# Altium PCB EE52_Digital_Oscilloscope.PcbDoc (part 3 of 5)
Units mil, origin at the board's own origin, x right, y up, seen from the top; angles counter-clockwise.
Board outline 7431 x 5662 mil, 2 copper layers (Top Layer, Bottom Layer); 305 components, 396 nets, 1532 pads, 389 vias.
Unrouted connection lines stored in the file: 2.
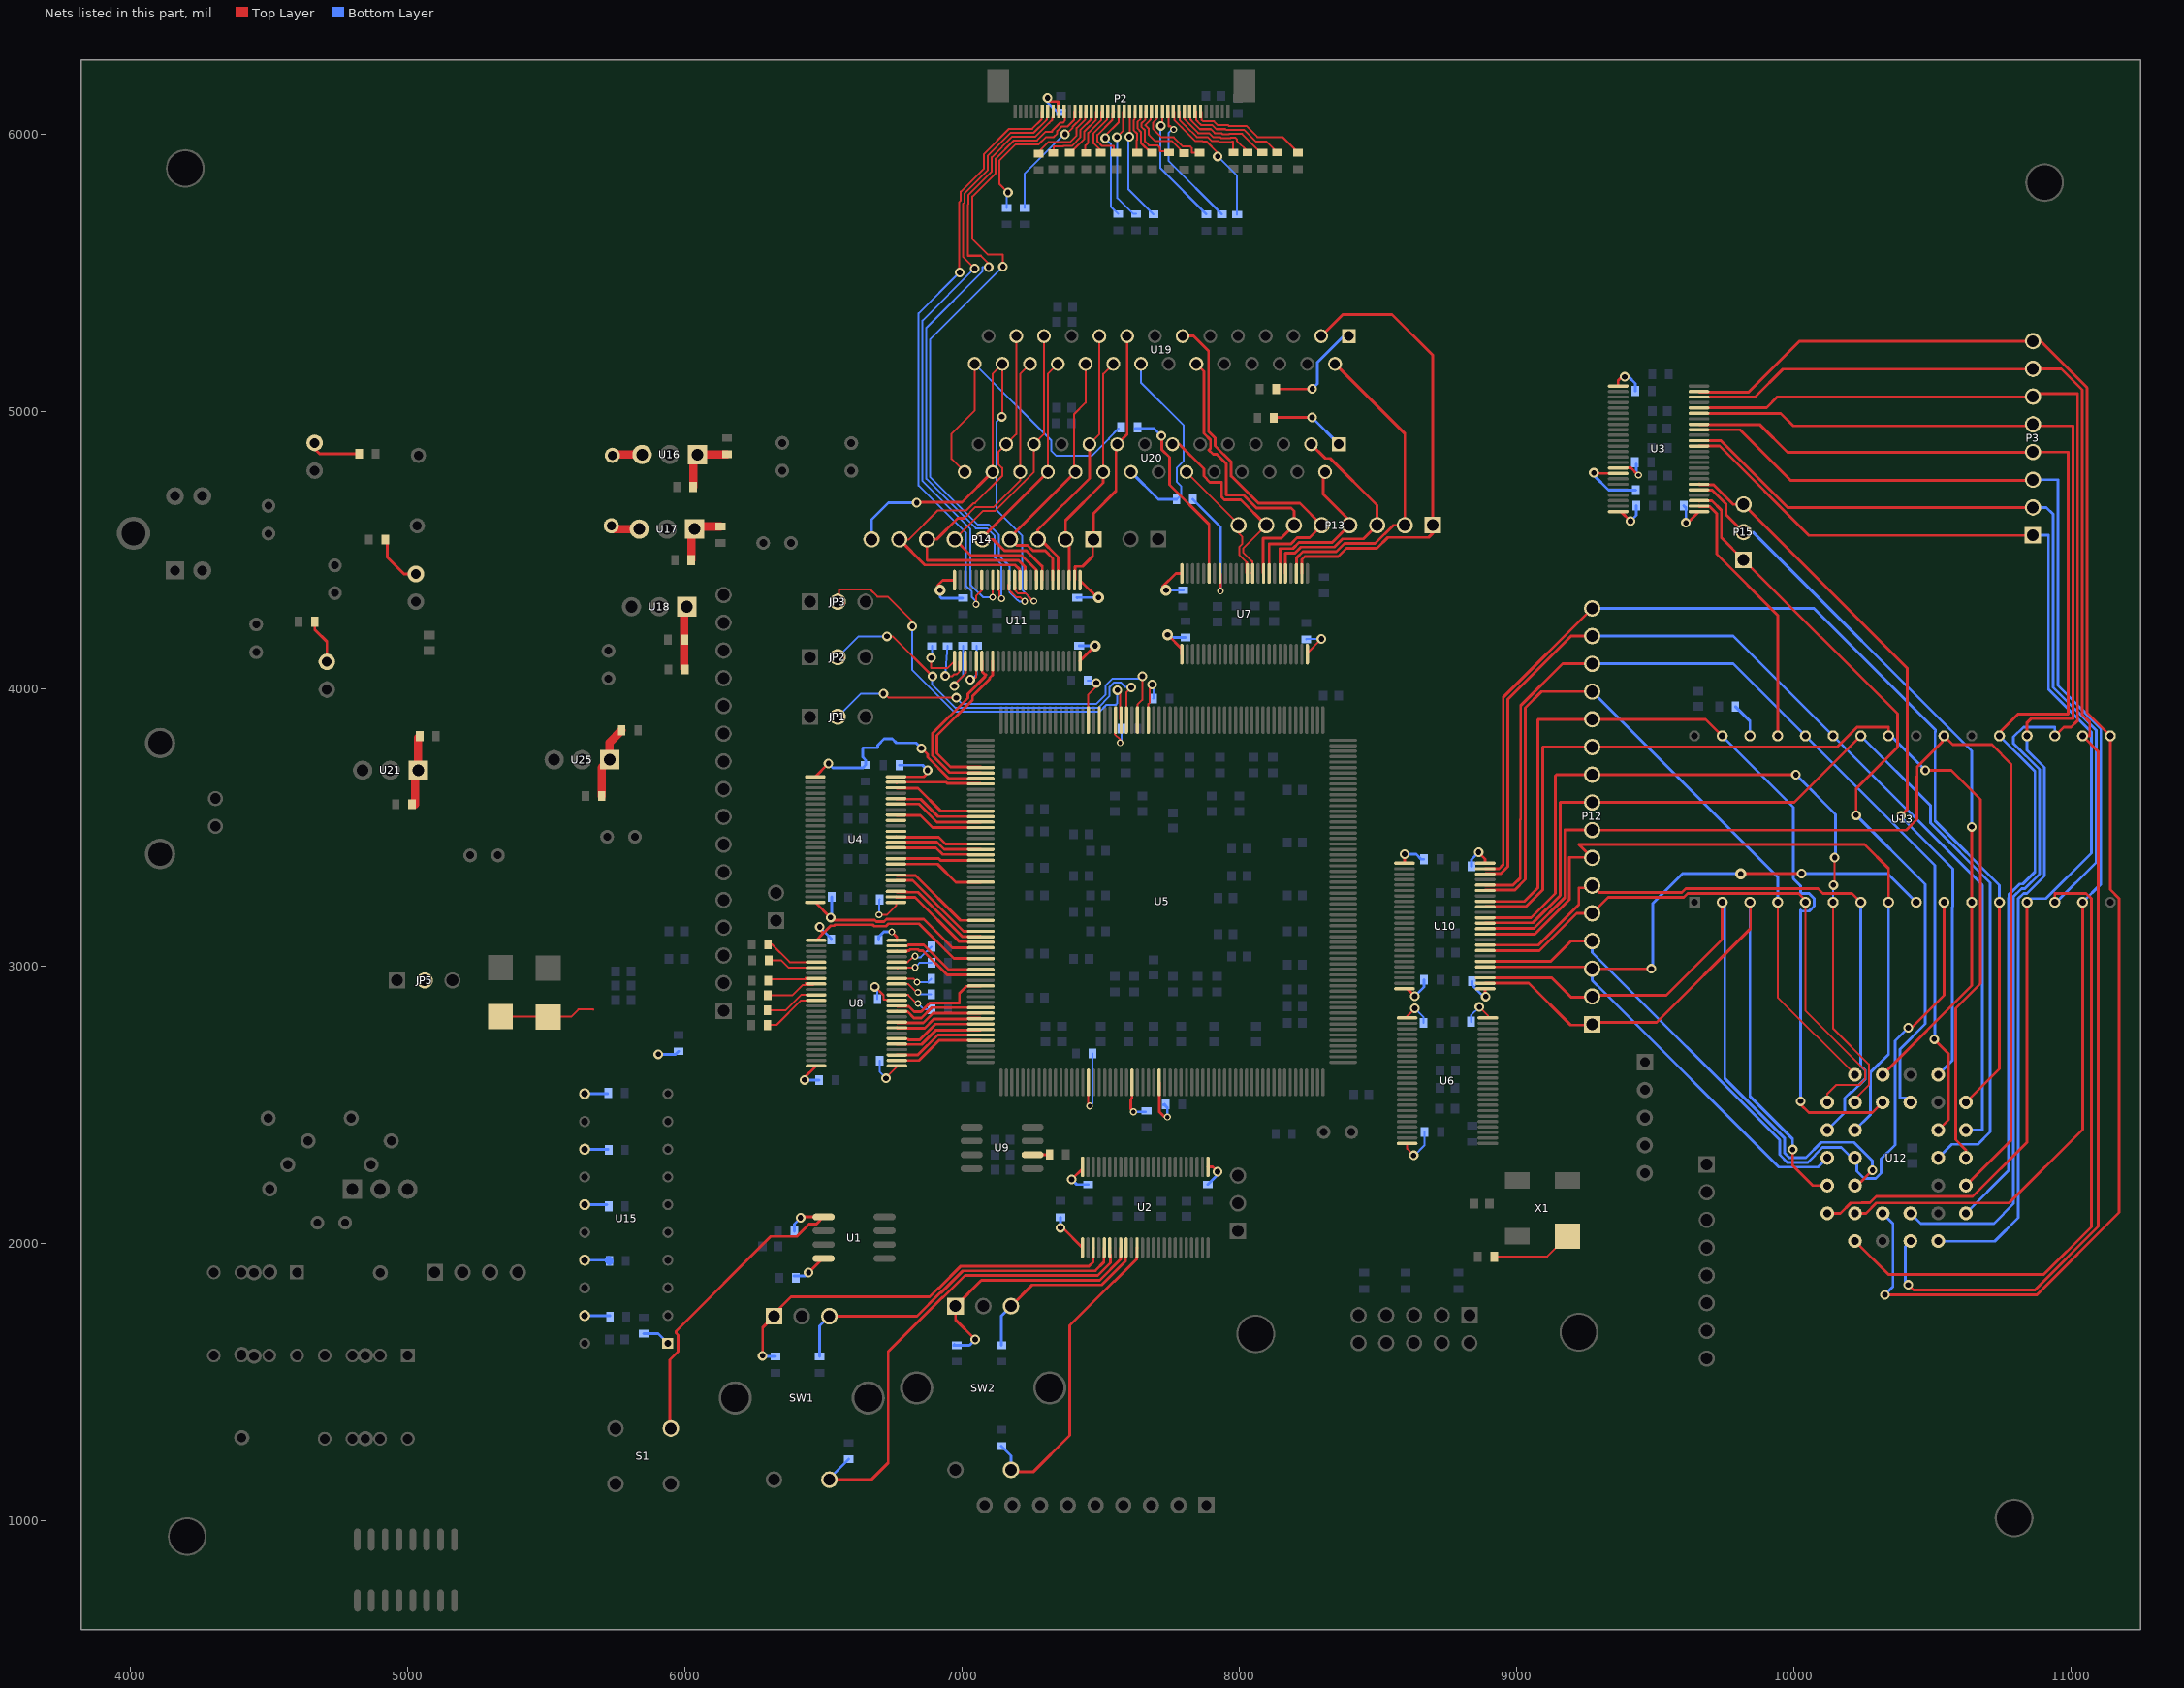
[diagram p3: the nets of this part, all layers, seen from the top]

## Via types
v1: diameter 35, hole 20, Top Layer to Bottom Layer, 188 vias
v2: diameter 25, hole 15, Top Layer to Bottom Layer, 82 vias
v3: diameter 60, hole 42, Top Layer to Bottom Layer, 48 vias
v4: diameter 50, hole 35, Top Layer to Bottom Layer, 46 vias
v5: diameter 80, hole 62, Top Layer to Bottom Layer, 14 vias
v6: diameter 40, hole 20, Top Layer to Bottom Layer, 10 vias
v7: diameter 45, hole 30, Top Layer to Bottom Layer, 1 vias

## Nets (pads, with @x,y where several pads share a name; then routed paths per layer and width w, separated by ;. In a path a pad name is that pad's centre, name@x,y a point inside that pad or via, vN(x,y) a via of type N, cw(c..) or ccw(c..) an arc to the next point about the centre after c; other vN are vias at no path point) (continued)
IO186: U5.186 U11.32 | length 597.4
  Top Layer w10: U5.186@7067.17,3715.83 7067.17,3717.61 6958.23,3717.61 6909,3766.83 6909,3831.74 7037.09,3959.83 7037.09,3973.81 7097.06,4033.77 7097.06,4034.39 7099.74,4037.07 7099.74,4039.56 7110.49,4050.31 7110.04,4050.75 U11.32@7110.04,4100.22
IO187: U5.187 U11.30 | length 632.6
  Top Layer w10: U5.187@7067.17,3694.36 U5.187@7067.17,3696.14 7065.39,3697.92 6953.87,3697.92 6892,3759.79 6892,3838.78 7020.09,3966.88 7020.09,3981.47 7082.74,4044.12 7082.74,4046.6 7086.45,4050.31 7085.93,4050.82 7082.94,4050.82 7072.45,4061.31 7072.45,4098.44 U11.30@7070.67,4100.22
IO188: R3.1 U4.1 U5.188 | length 787.1
  Top Layer w10: U4.1@6470,3682.44 v1(6517.56,3730) ; v1(6853,3785) 6875,3763 6875,3752.75 6951.29,3676.46 U5.188@7067.17,3676.46
  Bottom Layer w10: v1(6517.56,3730) 6533.06,3714.5 6641.97,3714.5 R3.1@6652,3724.53 6652,3743 6641,3754 6641,3785 6643.22,3787.22 6693.5,3787.22 6696,3789.72 6696,3797.33 6717.67,3819 6748.33,3819 6762.83,3804.5 6833.5,3804.5 v1(6853,3785)
IO189: U4.47 U5.189 | length 310.8
  Top Layer w10: U4.47@6763.12,3660.98 U4.47@6761.34,3662.76 6940.95,3662.76 6945.16,3658.55 7065.39,3658.55 U5.189@7067.17,3656.77
IO194: U4.46 U5.194 | length 340.9
  Top Layer w10: U4.46@6761.34,3643.07 6763.12,3641.29 6840.71,3641.29 6923.65,3558.35 U5.194@7067.17,3558.35
IO195: U4.44 U5.195 | length 332.8
  Top Layer w10: U4.44@6761.34,3603.7 6763.04,3602 6850,3602 6913.34,3538.66 U5.195@7067.17,3538.66
IO196: U4.43 U5.196 | length 333.2
  Top Layer w10: U4.43@6761.34,3584.02 6761.8,3584.48 6843.48,3584.48 6908.98,3518.98 U5.196@7067.17,3518.98
IO197: U4.41 U5.197 | length 324.6
  Top Layer w10: U4.41@6761.34,3544.65 6762.98,3543 6849,3543 6892.71,3499.29 U5.197@7067.17,3499.29
IO198: U4.40
IO199: U4.38
IO200: U4.37 U5.200 | length 316.5
  Top Layer w10: U4.37@6761.34,3465.91 6763.12,3464.13 6800.38,3464.13 6800.38,3464 6916,3464 6939.76,3440.24 U5.200@7067.17,3440.24
IO201: U4.36 U5.201 | length 318.9
  Top Layer w10: U4.36@6761.34,3444.44 U4.36@6761.34,3446.22 6762.12,3447 6908.96,3447 6935.41,3420.55 U5.201@7067.17,3420.55
IO202: U4.35 U5.202 | length 316.5
  Top Layer w10: U4.35@6761.34,3426.54 6905.38,3426.54 6929.27,3402.65 7065.39,3402.65 U5.202@7067.17,3400.87
IO203: U4.33 U5.203 | length 308.3
  Top Layer w10: U4.33@6761.34,3387.17 6761.5,3387 6916.04,3387 6921.86,3381.18 U5.203@7067.17,3381.18
IO207: U4.32 U5.207 | length 332.8
  Top Layer w10: U4.32@6761.34,3367.48 6911.52,3367.48 6976.56,3302.44 U5.207@7067.17,3302.44
IO214: U4.30 U5.214 | length 373.5
  Top Layer w10: U4.30@6761.34,3328.11 6763.12,3326.33 6831.67,3326.33 6993.35,3164.65 U5.214@7067.17,3164.65
IO216: U4.29 U5.216 | length 381.7
  Top Layer w10: U4.29@6761.34,3308.43 6821.57,3308.43 7004.72,3125.28 U5.216@7067.17,3125.28
IO217: U4.27 U5.217 | length 376.8
  Top Layer w10: U4.27@6761.34,3269.06 6763.12,3267.28 6801.55,3267.28 6801.55,3265.98 6839.98,3265.98 7000.37,3105.59 U5.217@7067.17,3105.59 U5.217@7065.39,3107.37
IO218: U4.26 U5.218 | length 374.6
  Top Layer w10: U4.26@6761.34,3249.37 6761.34,3247.59 6830.41,3247.59 6990.32,3087.68 7065.39,3087.68 U5.218@7067.17,3085.91
IO219: R6.1 U4.24 U5.219 | length 763.8
  Top Layer w10: U4.24@6470,3229.69 v1(6525,3174.69) ; v1@6525,3180 v1(6525,3174.69) ; U5.219@7067.17,3066.22 6964.82,3066.22 6861.54,3169.5 6726.74,3169.5 6717.74,3160.5 6689.85,3160.5 6684.35,3166 6533.69,3166 v1(6525,3174.69)
  Bottom Layer w10: v1(6525,3174.69) 6525,3184 6529.47,3179.53 R6.1@6529.47,3250
IO221: R12.1 U5.221 U8.1 | length 767
  Top Layer w10: U8.1@6473,3092.44 6498.56,3118 ; v1(6486,3141) 6486,3130.56 6498.56,3118 ; U5.221@7067.17,3026.85 6970.15,3026.85 6844.5,3152.5 6733.78,3152.5 6724.78,3143.5 6682.81,3143.5 6677.31,3149 6541.03,3149 6537.22,3145.19 6525.75,3145.19 6498.56,3118
  Bottom Layer w10: v1(6486,3141) 6527.47,3099.53 R12.1@6527.47,3095
IO223: U5.223 U8.47 | length 341.1
  Top Layer w10: U8.47@6764.34,3072.76 6801.47,3072.76 6805.22,3076.5 6861.01,3076.5 6864.76,3072.76 ; 6865,3073 6950.52,2987.48 U5.223@7067.17,2987.48
IO224: U5.224 U8.46 | length 345.4
  Top Layer w10: U8.46@6764.34,3053.07 6764.93,3052.48 6800.5,3052.48 6800.5,3054.85 6803.25,3054.85 6804.16,3055.76 6808.51,3055.76 6812.26,3059.5 6840.15,3059.5 6843.89,3055.76 6858.2,3055.76 6946.16,2967.8 U5.224@7067.17,2967.8
IO226: U5.226 U8.36 | length 370.4
  Top Layer w10: U8.36@6764.34,2856.22 6766.12,2854.44 6807.61,2854.44 6827.05,2835 6851.67,2835 6883.35,2866.69 6990,2866.69 6990,2900.99 7015.65,2926.65 7065.39,2926.65 U5.226@7067.17,2928.43
IO230: U5.230 U8.35 | length 328.3
  Top Layer w10: U8.35@6764.34,2836.54 6766.12,2834.76 6803.25,2834.76 6824.78,2813.22 6825.62,2812.39 6853.09,2812.39 6890.39,2849.69 U5.230@7067.17,2849.69
IO231: U5.231 U8.33 | length 318.1
  Top Layer w10: U8.33@6764.34,2797.17 6766.12,2795.39 6859.61,2795.39 6859.88,2795.12 6894.75,2830 U5.231@7067.17,2830
IO232: U5.232 U8.32 | length 319.4
  Top Layer w10: U8.32@6764.34,2777.48 6766.12,2775.7 6864.49,2775.7 6897.33,2808.54 7019.4,2808.54 7022.96,2812.09 7065.39,2812.09 U5.232@7067.17,2810.32
IO233: U5.233 U8.30 | length 328
  Top Layer w10: U8.30@6764.34,2738.11 6764.45,2738 6779.78,2738 6781.44,2736.33 6803.25,2736.33 6805.58,2734 6846.83,2734 6903.46,2790.63 U5.233@7067.17,2790.63
IO234: U5.234 U8.29 | length 325.8
  Top Layer w10: U8.29@6764.34,2718.43 6775.31,2718.43 6776.73,2717 6853.88,2717 6906.04,2769.17 7065.39,2769.17 U5.234@7067.17,2770.94
IO235: U5.235 U8.27 | length 332.8
  Top Layer w10: U8.27@6764.34,2679.06 6764.39,2679 6839.92,2679 6912.18,2751.26 U5.235@7067.17,2751.26
IO236: U5.236 U8.26 | length 332.7
  Top Layer w10: U8.26@6764.34,2659.37 6844.33,2659.37 6916.53,2731.57 U5.236@7067.17,2731.57
MSEL0: JP1.2 U5.155 | length 1388.8
  Top Layer w7: v1(6716,3982) 6716,3986 6734,3968 6979,3968 v1(6979,3967.5) ; U5.155@7632.13,3887.09 7632.13,3942.13 7650,3960 v1(7650,4045)
  Bottom Layer w7: JP1.2@6551,3899 6634,3982 v1(6716,3982) ; v1@6977,3965 v1@6979,3967 ; v1(6979,3967.5) v1@6979,3967 ; v1@7658.2,4036.8 7658,4037 7542.6,4037 7518,4012.4 7518,3979.4 7483.6,3945 7001,3945 v1@6979,3967
MSEL1: JP2.2 U5.157 | length 1401.7
  Top Layer w7: v1(6729,4189) 6749,4189 6893,4045 v1(6892.5,4044.5) ; U5.157@7592.76,3887.09 7592.76,3987.76 v1(7610,4005)
  Bottom Layer w7: JP2.2@6551,4114 6626,4189 v1(6729,4189) ; v1(6892.5,4044.5) 6890.5,4044.5 6890.5,4016.4 6975.9,3931 7489.4,3931 7532,3973.6 7532,4006.6 7548.4,4023 7571.6,4023 7588,4006.6 v1@7604,4006.6
MSEL2: JP3.2 U5.158 | length 1527.8
  Top Layer w7: JP3.2@6551,4314 6555,4318 6555,4357.5 6669.11,4357.5 6694.11,4332.5 6731.5,4332.5 6820,4244 v1(6820,4225) ; v1(7560,3995) 7569.79,3985.21 7569.79,3890.37 U5.158@7573.07,3887.09
  Bottom Layer w7: v1(6820,4225) 6833,4225 6820,4212 6820,4067.1 6970.1,3917 7495.2,3917 7520.2,3942 7554,3942 7560,3948 v1(7560,3995)
NCEO: U5.162
NetC116_1: 
NetC117_1: 
NetC120_1: 
NetD1_1: D1.1 R106.2 | length 192
  Top Layer w10: R106.2@4925.53,4538 4925.53,4474.47 4986,4414 D1.1@5029,4414
NetD2_1: 
NetD3_1: D3.1 R105.2 | length 187.7
  Top Layer w10: D3.1@4650,4880 4682,4848 R105.2@4824.47,4848
NetD5_1: D5.1 D7.2 | length 346.8
  Top Layer w7: D7.2@5334,2817.42 5589.42,2817.42 5615,2843 5668.7,2843 5669.75,2841.95
NetD6_1: D6.1 R113.1 | length 163
  Top Layer w10: R113.1@4664.53,4242 4664.53,4213.47 4708,4170 D6.1@4708,4097
NetD8_1: 
NetJP5_2: JP5.2
NetP2_5: P2.5 R89.2 | length 428.4
  Top Layer w7: P2.5@7859.94,6081.5 7863.22,6078.22 7863.22,6052.54 7869.38,6046.39 7908.63,6046.39 7922.63,6032.39 7959.01,6032.39 7961.4,6030 8025.02,6030 8065.02,5990 8155.53,5990 R89.2@8212,5933.53
NetP2_6: P2.6 R70.1 | length 374.6
  Top Layer w7: P2.6@7840.26,6081.5 7843.54,6081.5 7843.54,6052.54 7849.22,6046.85 7849.22,6046.74 7863.58,6032.39 7902.83,6032.39 7916.83,6018.39 7949.78,6018.39 7952.17,6016 8017.1,6016 8058.6,5974.5 8097.03,5974.5 R70.1@8137,5934.53
NetP2_7: P2.7 R69.2 | length 338.3
  Top Layer w7: P2.7@7820.57,6081.5 7823.85,6078.22 7823.85,6052.43 7835.22,6041.06 7835.22,6040.94 7857.78,6018.39 7897.03,6018.39 7911.03,6004.39 7935.78,6004.39 7939.39,6000.78 7962.7,6000.78 ; 7962.92,6001 8010.18,6001 8076.65,5934.53 R69.2@8083,5934.53
NetP2_8: P2.8 R72.1 | length 310.5
  Top Layer w7: P2.8@7800.89,6081.5 7800.89,6055.59 7821.22,6035.26 7821.22,6035.14 7851.98,6004.39 7891.23,6004.39 7905.23,5990.39 7929.99,5990.39 7933.59,5986.78 7968.5,5986.78 7968.72,5987 7986.19,5987 7991,5982.19 7991,5977.04 R72.1@8030,5938.04
  Top Layer w10: R72.1@8030,5934.53 R72.1@8030,5938.04
NetP2_9: P2.9 R71.2 | length 298.3
  Top Layer w7: P2.9@7781.2,6081.5 P2.9@7784,6078.7 ; P2.9@7784,6081.5 P2.9@7784,6078.7 ; R71.2@7977,5936.53 7977,5973 7974.51,5973 7974.3,5972.78 7927.79,5972.78 7924.19,5976.39 7899.43,5976.39 7885.43,5990.39 7846.18,5990.39 7807.22,6029.34 7807.22,6029.46 7784.48,6052.2 7784.48,6078.22 P2.9@7784,6078.7
  Top Layer w10: R71.2@7977,5936.53 R71.2@7979,5934.53
NetP2_10: P2.10 R74.1 | length 488.8
  Top Layer w7: P2.10@7761.52,6081.5 7764.8,6078.22 7764.8,6052.08 7793.22,6023.66 7793.22,6023.55 7840.38,5976.39 7866.63,5976.39 7869,5974.01 7880.99,5974.01 7922,5933 v1(7922,5920)
  Bottom Layer w7: v1(7922,5920) 7992,5850 R74.1@7992,5710.53
NetP2_11: P2.11 R73.2 | length 471
  Top Layer w7: P2.11@7738.56,6078.22 P2.11@7741.83,6081.5 7745.11,6078.22 7745.11,6028.89 7751.11,6028.89 v2(7763,6017)
  Bottom Layer w7: v2@7756,6017 7745,6006 7745,5903.53 R73.2@7937,5711.53
NetP2_12: P2.12 R76.1 | length 442
  Top Layer w7: v1(7717,6030.5) 7717.5,6030.5 7722.15,6035.15 P2.12@7722.15,6081.5
  Bottom Layer w7: v1(7717,6030.5) 7717,6021 7715,6019 7715,5877.53 R76.1@7881,5711.53
NetP2_13: P2.13 R75.2 | length 281.8
  Top Layer w7: P2.13@7702.46,6081.5 7702.46,6055.71 7688,6041.24 7688,6019.9 7718.9,5989 7763.33,5989 7796.52,5955.81 7823.07,5955.81 7829.22,5949.66 7829.22,5933.53 R75.2@7857,5933.53
NetP2_14: P2.14 R78.1 | length 252.6
  Top Layer w7: P2.14@7682.78,6081.5 7679.5,6078.22 7679.5,6052.54 7674,6047.04 7674,6046.58 7661,6033.58 7661,6031.99 7673,6019.99 7673,5998.67 7677.11,5994.55 7696.67,5975 7757.53,5975 R78.1@7801,5931.53
NetP2_15: P2.15 R79.2 | length 230.5
  Top Layer w7: P2.15@7663,6082.42 7659.82,6079.24 7659.82,6052.2 7646.04,6038.42 7646.04,6027.16 7659,6014.2 7659,5974.44 7673.44,5960 7704.87,5960 7713.22,5951.66 7713.22,5940.39 7714.6,5939 7741.53,5939 R79.2@7746,5934.53
NetP2_16: P2.16 R80.1 | length 191.8
  Top Layer w7: P2.16@7643.41,6081.5 7643.41,6055.59 7632.04,6044.22 7632.04,6021.36 7645,6008.4 7645,5968.64 7680.11,5933.53 R80.1@7685,5933.53 ; R80.1@7669.76,5946 R80.1@7679.9,5935.86
NetP2_17: P2.17 R81.2 | length 156.7
  Top Layer w7: P2.17@7623,6080.77 7623,6054.98 7618.04,6050.02 7618.04,6015.56 7631,6002.6 7631,5979.4 7629,5977.4 7629,5936.53 R81.2@7632,5933.53
NetP2_18: P2.18 R82.1 | length 409.7
  Top Layer w7: v1(7603,5991) 7603,6006 7604.04,6007.04 P2.18@7604.04,6081.5
  Bottom Layer w7: v1(7603,5991) 7599,5987 7599,5802.53 R82.1@7690,5711.53
NetP2_19: P2.19 R83.2 | length 415
  Top Layer w7: v1(7558,5990) 7581.08,6013.08 7581.08,6078.22 P2.19@7584.35,6081.5
  Bottom Layer w7: v1(7558,5990) 7558,5980 7560,5978 7560,5770 7617.47,5712.53 R83.2@7628,5712.53
NetP2_20: P2.20 R84.1 | length 408.6
  Top Layer w7: v1(7516,5986) 7516,5995 7564.67,6043.67 P2.20@7564.67,6081.5
  Bottom Layer w7: v1(7516,5986) 7536,5966 7536,5739.53 R84.1@7563,5712.53
NetP2_21: P2.21 R85.2 | length 229.6
  Top Layer w7: R85.2@7548.26,5930 7548.26,5941.07 7547.6,5941.74 7547.6,5958.6 7547,5958 7504.4,5958 7488,5974.4 7488,5998.04 7541.71,6051.74 7541.71,6071.66 P2.21@7548.26,6078.22 ; R85.2@7551.26,5937.26 R85.2@7555,5933.53
NetP2_22: P2.22 R86.1 | length 182.3
  Top Layer w7: R86.1@7500,5932 7500,5943 7498.6,5943 7474,5967.6 7474,6003.84 7522.02,6051.86 7522.02,6078.22 P2.22@7525.3,6081.5
NetP2_23: P2.23 R87.2 | length 175
  Top Layer w7: R87.2@7444,5932 7444,5959 7455.1,5970.1 7455.1,6004.73 7502.34,6051.97 7502.34,6078.22 P2.23@7505.61,6081.5
NetP2_24: P2.24 R88.1 | length 204.5
  Top Layer w7: R88.1@7393,5931 7385,5939 7385,5943 7400.2,5943 7441.1,5983.9 7441.1,6010.53 7482.65,6052.08 7482.65,6078.22 P2.24@7485.93,6081.5
NetP2_25: P2.25 R77.2 | length 252.1
  Top Layer w7: R77.2@7329,5932.53 R77.2@7329,5940 ; R77.2@7330,5931 7330,5957 7365.13,5957 7365.93,5957.81 7395.2,5957.81 7427.1,5989.7 7427.1,6016.33 7462.97,6052.2 7462.97,6078.22 P2.25@7466.24,6081.5
NetP2_26: P2.26 R90.1 | length 266.3
  Top Layer w7: R90.1@7271.86,5934.66 7273.47,5934.66 7310.61,5971.81 7389.41,5971.81 7413.1,5995.5 7413.1,6022.13 7443.28,6052.31 7443.28,6078.22 P2.26@7446.56,6081.5
NetP2_27: P2.27 R91.2 | length 440.7
  Top Layer w7: v1(7371,6000) 7371.17,6000 7375.17,6004 7379.7,6004 7399.1,6023.4 7399.1,6027.93 7426.87,6055.71 P2.27@7426.87,6081.5 P2.27@7423.59,6078.22
  Bottom Layer w7: R91.2@7226,5734.53 7226,5859 7368,6001 7370,6001 v1(7371,6000)
NetP2_28: P2.28 R92.1 | length 550.4
  Top Layer w7: v1(7165,5790) 7135,5820 7135,5906 7192.5,5963.5 7275.95,5963.5 7302.84,5990.39 7330.19,5990.39 7343,6003.2 7343,6011.6 7359.4,6028 7379.37,6028 7403.91,6052.54 7403.91,6078.22 P2.28@7407.19,6081.5
  Bottom Layer w7: R92.1@7161,5734.53 7161,5786 v1(7165,5790)
NetP2_30: P2.30 U11.14 | length 2451.2
  Top Layer w7: v1(7147,5523) 7147,5567 7092,5567 7036.9,5622.1 7036.9,5775.9 7121,5860 7121,5911.8 7186.7,5977.5 7270.16,5977.5 7301.66,6009 7325,6009 7325,6013.4 7353.6,6042 7363.78,6042 7371.1,6049.32 P2.30@7371.1,6078.22 ; U11.14@7171,4389.66 7171,4375 7165.82,4375 7165.82,4359.71 7174.1,4351.43 7174.21,4351.43 7178.06,4347.58 7178.06,4347.47 7195.87,4329.66 7210.34,4329.66 v2(7225,4315) ; P2.30@7364.54,6078.22 P2.30@7367.82,6081.5
  Bottom Layer w7: v1(7147,5523) 6885,5261 6885,4763 7054.97,4593.03 7095.38,4593.03 7132.97,4555.43 7132.97,4480.03 7171,4442 7171,4348 7199.52,4319.48 7200.8,4319.48 7205.64,4314.64 7206,4315 v2(7225,4315)
NetP2_31: P2.31 R93.1 | length 163.6
  Top Layer w10: v1(7308,6131) 7308,6126.1 7316,6118.1 7346.35,6118.1 7346.35,6083.28 P2.31@7348.13,6081.5
  Bottom Layer w10: v1(7308,6131) 7308,6115 7343.53,6079.47 R93.1@7357,6079.47
NetP2_32: P2.32 U11.16 | length 2309.3
  Top Layer w7: v1(7095,5521) 7095,5534 7067,5562 7021,5562 7021,5747 7022.9,5748.9 7022.9,5781.7 7107,5865.8 7107,5917.6 7180.9,5991.5 7264.36,5991.5 7313.8,6040.94 7313.8,6041.06 7325.17,6052.43 7325.17,6060.39 7328.45,6060.39 P2.32@7328.45,6081.5 ; U11.16@7129.73,4391.56 7129.73,4356.55 7133.96,4352.31 7133.96,4328.04 7137,4325 7137.36,4325.36 v2(7142,4325.36)
  Bottom Layer w7: v1(7095,5521) 7074,5521 7073,5520 7073,5504.4 6871,5302.4 6871,4757.2 7049.17,4579.03 7089.58,4579.03 7117,4551.61 7117,4474 7144,4447 7142,4445 v2(7142,4325.36)
NetP2_33: P2.33 U11.17 | length 2211.2
  Top Layer w7: v1(7045,5516) 7003,5558 7003,5749 7008.9,5754.9 7008.9,5787.5 7093,5871.6 7093,5923.4 7175.1,6005.5 7258.56,6005.5 7299.8,6046.74 7299.8,6046.86 7305.48,6052.54 7305.48,6074.39 7308.76,6074.39 P2.33@7308.76,6081.5 ; v2(7110,4330) 7110,4391.52 U11.17@7110.04,4391.56
  Bottom Layer w7: v1(7045,5516) 6857,5328 6857,4749 7030,4576 7030,4374.8 7040.7,4364.1 7040.9,4364.1 7075,4330 v2(7110,4330)
NetP2_34: P2.34 U11.19 | length 2193.4
  Top Layer w7: v1(6991,5502) 6989,5504 6989,5754.8 6994.9,5760.7 6994.9,5793.3 7079,5877.4 7079,5929.2 7169.3,6019.5 7252.76,6019.5 7285.8,6052.54 7285.8,6078.22 P2.34@7289.08,6081.5 ; v2(7050,4305) 7050,4334.8 7069.52,4354.31 7070.67,4354.31 U11.19@7070.67,4391.56
  Bottom Layer w7: v1(6991,5502) 6843,5354 6843,4733 7013.03,4562.97 7013.03,4371.97 7035.1,4349.9 7035.1,4330.1 7050,4315.2 v2(7050,4305)
NetP3_1: P3.1 U3.13 U12.13 U13.13 | length 4603.3
  Top Layer w10: U3.13@9658,4875.22 9732.82,4875.22 10055.04,4553 P3.1@10863,4553 ; U12.13@10121,2108 10168.67,2108 10205.67,2145 10245,2145 10245.5,2145.5 10274.42,2145.5 10297.92,2169 10646,2169 10842,2365 U13.13@10842,3230
  Bottom Layer w10: U13.13@10842,3230 10855.25,3243.25 10910,3243.25 11074,3407.25 11074,3843.25 10919,3998.25 10919,4554 P3.1@10863,4554
NetP3_2: P3.2 U3.14 U12.14 U13.14 | length 5247.3
  Top Layer w10: U3.14@9658,4894.91 9737.18,4894.91 9979.08,4653 P3.2@10863,4653 ; U12.14@10221,2008 10342,1887 10902,1887 11074,2059 11074,3243.25 11055.25,3262 10942,3262 U13.14@10942,3230
  Bottom Layer w10: P3.2@10863,4654 10911.83,4654 10936,4629.83 10936,4005.3 11091,3850.3 11091,3373.96 10947.04,3230 U13.14@10942,3230
NetP3_3: P3.3 U3.16 U12.15 U13.15 | length 4752.5
  Top Layer w10: U3.16@9658,4934.28 9805.72,4934.28 9989,4751 P3.3@10863,4751 ; U12.15@10221,2108 10260.96,2108 10297.96,2145 10777,2145 11042,2410 U13.15@11042,3230
  Bottom Layer w10: P3.3@10863,4754 10953,4754 10953,4012.34 11108,3857.34 11108,3296 U13.15@11042,3230
NetP3_4: P3.4 U3.17 U12.21 U13.21 | length 4488.4
  Top Layer w10: U3.17@9658,4953.96 9659.78,4952.18 9697.09,4952.18 9697.09,4952 9879,4952 9978,4853 P3.4@10863,4853 ; U13.21@10736,3836 10809,3909 10990,3909 10990,4854 P3.4@10863,4854
  Bottom Layer w10: U12.21@10621,2108 10774,2261 10774,3243.25 10776,3245.25 10776,3257.34 10814.66,3296 10826.75,3296 10870,3339.25 10870,3702 U13.21@10742,3830
NetP3_5: P3.5 U3.19 U12.20 U13.20 | length 4782.9
  Top Layer w10: U3.19@9658,4993.33 9953.67,4993.33 9999,4948 P3.5@10863,4948 ; U13.20@10842,3830 10842,3878 10856,3892 11007,3892 11007,4948 P3.5@10863,4948 ; P3.5@10863,4954 P3.5@10863,4948
  Bottom Layer w10: U12.20@10521,2008 10522,2007 10725,2007 10810,2092 10810,3243.25 10828.75,3262 10840.83,3262 10904,3325.17 10904,3716.08 10842,3778.08 U13.20@10842,3830
NetP3_6: P3.6 U3.20 U12.19 U13.19 | length 5052.3
  Top Layer w10: U3.20@9658,5013.02 9658.98,5014 9902,5014 9941,5053 P3.6@10863,5053 ; P3.6@10863,5054 10873,5064 11024,5064 11024,3884.96 11001.04,3862 10974,3862 U13.19@10942,3830
  Bottom Layer w10: U12.19@10421,2108 10458,2071 10722,2071 10793,2142 10793,3250.3 10821.7,3279 10833.79,3279 10887,3332.21 10887,3709.04 10793,3803.04 10793,3826.25 10828.75,3862 10942,3862 U13.19@10942,3830
NetP3_7: P3.7 U3.22 U12.18 U13.18 | length 5499.8
  Top Layer w10: U3.22@9658,5052.39 9860.39,5052.39 9961,5153 P3.7@10863,5153 ; v1(10413,1850) 10432,1831 10870.04,1831 11099,2059.96 11099,3773 U13.18@11042,3830 11068,3830 11068,3879.96 11041,3906.96 11041,5079.08 10966.08,5154 P3.7@10863,5154
  Bottom Layer w10: v1@10413,1855 v1(10413,1850) 10402,1861 10402,1989 U12.18@10421,2008
NetP3_8: P3.8 U3.23 U12.17 U13.17 | length 5859.8
  Top Layer w10: U3.23@9658,5072.07 9659.78,5070.29 9697.82,5070.29 9697.82,5069.39 9837,5069.39 10020.61,5253 P3.8@10863,5253 ; v1(10329,1814) 10877.08,1814 11174,2110.92 11174,3243.25 11142,3275.25 U13.17@11142,3830 11058,3914 11058,5086.12 10890.12,5254 P3.8@10863,5254
  Bottom Layer w10: U12.17@10321,2108 10358,2071 10358,1843 v1(10329,1814)
NetP12_1: P12.1 U10.2 U12.11 U13.3 | length 2423.2
  Top Layer w10: U10.2@8887,2937.69 9044.31,2937.69 9195,2787 P12.1@9270,2787 ; P12.1@9273,2790 9279,2796 9505,2796 9844,3135 9844,3228 U13.3@9842,3230 ; v1(9996,2338) 9996,2281 10069,2208 U12.11@10121,2208
  Bottom Layer w10: U13.3@9842,3230 9842,2529.81 9996,2375.81 v1(9996,2338)
NetP12_2: P12.2 U10.3 U12.12 U13.2 | length 2597.3
  Top Layer w10: U10.3@8887,2957.37 9126.63,2957.37 9197,2887 9270,2887 P12.2@9273,2890 9277,2894 9540,2894 9742,3096 U13.2@9742,3230 ; U12.12@10221,2208 10229,2208 v1(10284,2263)
  Bottom Layer w10: U13.2@9742,3230 9751,3221 9751,2594.77 9966.5,2379.27 9966.5,2325.78 9983.78,2308.5 10043.46,2308.5 10098.96,2364 10217.33,2364 10242.16,2339.16 10284,2297.33 v1(10284,2263)
NetP12_3: P12.3 U10.5 U12.9 U13.9 | length 3066.2
  Top Layer w10: U10.5@8887,2996.74 9266.26,2996.74 P12.3@9273,2990 v1(9486,2990) ; v6(9809,3333) 10023,3333 10024,3334 v1(10028,3334)
  Bottom Layer w10: P12.3@9273,2990 9273,2948.08 9289.55,2931.53 9290.2,2931.53 9314.53,2907.2 9314.53,2906.55 9946.58,2274.5 10087.5,2274.5 U12.9@10121,2308 ; v1(9486,2990) 9492,2996 9492,3226 9599,3333 9797,3333 v6@9809,3321 ; v1(10028,3334) 10338,3334 U13.9@10442,3230
NetP12_4: P12.4 U10.6 U12.10 U13.10 | length 3039
  Top Layer w10: U10.6@8887,3016.43 9123.43,3016.43 9197,3090 P12.4@9273,3090 ; v1(10413,2777) 10413,2783 10419,2777 10425,2777 10542,2894 U13.10@10542,3230
  Bottom Layer w10: P12.4@9273,3090 9273,3048.73 9949.5,2372.23 9949.5,2318.74 9976.74,2291.5 10050.5,2291.5 10104,2345 10172,2345 10215,2302 U12.10@10221,2308 U12.10@10227.5,2301.5 ; U12.10@10227.5,2302.78 U12.10@10227.5,2301.5 ; v1(10413,2777) 10365.78,2729.78 10365.78,2354.61 10315.5,2304.33 10315.5,2252.78 10296.22,2233.5 10253.5,2233.5 10227.5,2259.5 U12.10@10227.5,2301.5
NetP12_5: P12.5 U10.8 U12.5 U13.5 | length 2166.5
  Top Layer w7: U13.5@10042,3230 10042,2839.33 10256.5,2624.83 10256.5,2591.17 10236.33,2571 10154,2571 10121,2538 U12.5@10121,2508
  Top Layer w10: U10.8@8887,3055.8 9082.84,3055.8 9217.04,3190 P12.5@9273,3190 9331,3248 9603.03,3248 9617.03,3262 10018,3262 10037,3243 U13.5@10037,3235
NetP12_6: P12.6 U10.9 U12.7 U13.7 | length 2403.6
  Top Layer w10: U10.9@8887,3075.48 9078.48,3075.48 9225,3222 9225,3282 9265,3282 P12.6@9273,3290 9298,3265 9595.99,3265 9609.99,3279 10088,3279 10105,3262 10210,3262 U13.7@10242,3230
  Bottom Layer w10: U12.7@10121,2408 10184,2471 10184,2523.33 10205.67,2545 10210.33,2545 10258,2592.67 10258,2623.33 10242,2639.33 U13.7@10242,3230
NetP12_7: P12.7 U10.11 U12.8 U13.8 | length 2802.5
  Top Layer w10: U10.11@8887,3114.85 9065.85,3114.85 9191,3240 9191,3392 P12.7@9271,3392 ; P12.7@9273,3390 P12.7@9271,3392 ; U13.8@10342,3230 10342,3352 10256,3438 9225,3438 P12.7@9271,3392
  Bottom Layer w10: U12.8@10221,2408 10276,2463 10276,2615.33 10342,2681.33 U13.8@10342,3230
NetP12_8: P12.8 U10.12 U12.23 U13.23 | length 4085.7
  Top Layer w10: U10.12@8887,3134.54 8888.78,3136.31 9063.27,3136.31 9174,3247.04 9174,3491 P12.8@9272,3491 ; P12.8@9273,3490 10406,3490 10445,3529 10445,3684.5 10445.5,3685 ; 10445.5,3676.5 10445.5,3685 ; U12.23@10621,2208 10784,2371 10784,3729 10715,3798 10574,3798 U13.23@10542,3830 10536,3824 10536,3808.72 10445.5,3718.22 10445.5,3685
NetP12_9: P12.9 U10.13 U12.26 U13.26 | length 3682.1
  Top Layer w10: U10.13@8887,3154.22 8888.78,3156 9058.92,3156 9157,3254.08 9157,3591 9272,3591 P12.9@9273,3590 10002,3590 U13.26@10242,3830
  Bottom Layer w10: U13.26@10242,3830 10493,3579 10493,3515.96 10709,3299.96 10709,2401 10665,2357 10570,2357 U12.26@10521,2308
NetP12_10: P12.10 U10.14 U12.6 U13.6 | length 2901.7
  Top Layer w7: U13.6@10142,3230 10142,2774 10270.5,2645.5 10270.5,2570.5 U12.6@10221,2521 ; v1(10143,3292) 10148,3297 v1(10148,3391)
  Top Layer w10: U10.14@8887,3173.91 9052.78,3173.91 9140,3261.12 9140,3687 9143,3690 P12.10@9273,3690 v1(10008,3690) ; U12.6@10221,2508 U12.6@10221,2521
  Bottom Layer w7: U13.6@10142,3230 10142,3291 v1(10143,3292)
  Bottom Layer w10: v1(10008,3690) 10151,3547 v1@10151,3391
NetP12_11: P12.11 U10.16 U12.25 U13.25 | length 3829.9
  Top Layer w10: U10.16@8887,3213.28 8888.78,3215.05 9034.1,3215.05 9094,3274.96 9094,3790 P12.11@9273,3790 10156.75,3790 10228.75,3862 10342,3862 U13.25@10342,3830 ; v1(10475,3706) 10569,3706 10674,3601 10674,2936.96 10584,2846.96 10584,2373 10621,2336 U12.25@10621,2308
  Bottom Layer w10: U13.25@10342,3830 10351,3830 v1(10475,3706)
NetP12_12: P12.12 U10.17 U12.3 U13.31 | length 3364.2
  Top Layer w10: U10.17@8887,3232.96 9027.96,3232.96 9077,3282 9077,3888 9078,3889 9272,3889 P12.12@9273,3890 9682,3890 U13.31@9742,3830 ; v1(10025,2512) 10025,2500 10054,2471 10284,2471 U12.3@10321,2508
  Bottom Layer w10: U13.31@9742,3830 9998.5,3573.5 9998.5,3315.28 10025,3288.78 10025,3258.25 10028.75,3262 10055.25,3262 10074,3243.25 10074,3216.75 10055.25,3198 10028.75,3198 10025,3201.75 v1(10025,2512)
NetP12_13: P12.13 U10.19 U12.4 U13.4 | length 2820.4
  Top Layer w7: U13.4@9942,3230 9942,2887 U12.4@10221,2608
  Top Layer w10: U10.19@8887,3274.11 8994.15,3274.11 9032,3311.96 9032,3931.96 9090.04,3990 P12.13@9273,3990
  Bottom Layer w10: P12.13@9273,3990 9942,3321 U13.4@9942,3230
NetP12_14: P12.14 U10.20 U12.28 U13.28 | length 3610.6
  Top Layer w10: U10.20@8887,3292.02 8988.02,3292.02 9013,3317 9013,3528 9015,3530 9015,3939 9166,4090 P12.14@9273,4090 ; v1(10507,2736) 10506,2736 10558,2684 10558,2445 U12.28@10521,2408
  Bottom Layer w10: P12.14@9273,4090 9782,4090 U13.28@10042,3830 10509,3363 10509,2738 v1(10507,2736)
NetP12_15: P12.15 U10.22 U12.27 U13.27 | length 3816.8
  Top Layer w10: U10.22@8887,3331.39 8888.78,3333.16 8943.21,3333.16 8969,3358.96 8969,3961.96 9197.04,4190 P12.15@9273,4190
  Bottom Layer w10: P12.15@9273,4190 9782,4190 U13.27@10142,3830 10680,3292 10680,2408 U12.27@10621,2408
NetP12_16: P12.16 U10.23 U12.29 U13.12 | length 4039
  Top Layer w10: U10.23@8887,3351.07 8937.07,3351.07 8952,3366 8952,3969 P12.16@9273,4290 ; U12.29@10621,2508 10742,2629 U13.12@10742,3230
  Bottom Layer w10: P12.16@9273,4290 10073,4290 10512,3851 10512,3845.25 10510,3843.25 10510,3523 10742,3291 U13.12@10742,3230
NetP13_1: P13.1 U7.2 U19.3 | length 1673.8
  Top Layer w10: U7.2@8225.32,4416 8225.32,4466.27 8236.04,4477 8356.12,4477 8386.12,4507 8496.77,4507 8535.77,4546 8683,4546 8697,4560 ; U19.3@8292,5269 U19.3@8295,5272 8373,5350 8551,5350 8697,5204 P13.1@8697,4590
NetP13_2: P13.2 U7.3 U19.2 | length 1181.8
  Top Layer w10: U7.3@8205.63,4416 8205.63,4470.63 8229,4494 8349.08,4494 8379.08,4524 8489.73,4524 8555.73,4590 P13.2@8597,4590 8597,4920 U19.2@8345,5172
NetP13_3: P13.3 U7.5 U20.3 | length 846.3
  Top Layer w10: U7.5@8166.26,4416 8166.26,4488.26 8167,4489 8199.96,4489 8221.96,4511 8342.04,4511 8372.04,4541 8448,4541 P13.3@8497,4590 8497,4662 8328,4831 8310,4831 U20.3@8259,4882
NetP13_4: P13.4 U7.6 U20.2 | length 609.5
  Top Layer w10: U7.6@8146.58,4416 8146.58,4505.42 8146,4506 8192.92,4506 8214.92,4528 8335,4528 P13.4@8397,4590 8397,4607 8303,4701 8303,4776 U20.2@8309,4782
NetP13_5: P13.5 U7.8 U19.13 | length 1324.8
  Top Layer w10: U19.13@7795,5272 7835,5272 7889,5218 7889,4928.37 7913,4904.37 7913,4875.67 7970,4818.67 7970,4766.53 ; 7971.53,4766.53 8069.06,4669 8218,4669 P13.5@8297,4590 ; U7.8@8107.21,4416 8107.21,4523 8185.88,4523 8207.88,4545 8253,4545 P13.5@8297.5,4589.5
NetP13_6: P13.6 U7.9 U19.12 | length 1109.1
  Top Layer w10: U19.12@7845,5172 7872,5145 7872,4921.33 7896,4897.33 7896,4866.67 7890.14,4860.82 7904.96,4846 7918.63,4846 7953,4811.63 7953,4699 8015.02,4699 8062.02,4652 8186.67,4652 8197,4641.67 P13.6@8197,4590 8151,4544 8085.74,4544 8085.74,4417.78 U7.9@8087.52,4416
NetP13_7: P13.7 U7.11 U20.13 | length 728.7
  Top Layer w7: U7.11@8046.37,4417.78 8046.37,4459.27 8043.64,4462 8042.4,4462 8014,4490.4 8014,4507 P13.7@8097,4590
  Top Layer w10: U20.13@7759,4882 7783,4882 7872,4793 7872,4766.67 7893.67,4745 7936,4745 7936,4691.96 7945.96,4682 8005,4682 P13.7@8097,4590 ; U7.11@8046.37,4417.78 U7.11@8048.15,4416
NetP13_8: P13.8 U7.12 U20.12 | length 467.7
  Top Layer w7: U20.12@7809,4782 7997,4594 P13.8@7997,4590 ; P13.8@7993,4566 8011,4548 8011,4523.8 8000,4512.8 8000,4481.6 8026.69,4454.91
  Top Layer w10: P13.8@7993,4566 P13.8@7993,4590 ; 8026.69,4454.91 8026.69,4417.78 U7.12@8028.47,4416
NetP14_1: P14.1 U11.2 U19.17 U20.17 | length 974.3
  Top Layer w10: U11.2@7405.32,4391.56 7407.09,4393.34 7407.09,4440.26 7407.8,4440.96 7433.96,4440.96 7471,4478 7471,4537 P14.1@7473,4539 7473,4632 7555,4714 7555,4878 U20.17@7559,4882 7595,4918 U19.17@7595,5272
NetP14_2: P14.2 U11.3 U19.18 U20.18 | length 839.1
  Top Layer w7: U20.18@7509,4782 7509,5136 U19.18@7545,5172
  Top Layer w10: P14.2@7373,4539 7373,4607 7509,4743 U20.18@7509,4782 ; U11.3@7385.63,4391.56 P14.2@7385.63,4526.37
NetP14_3: P14.3 U11.5 U19.19 U20.19 | length 1008.1
  Top Layer w7: U20.19@7459,4882 7495,4918 U19.19@7495,5272
  Top Layer w10: U11.5@7346.26,4391.56 7346.26,4474.82 7282.08,4539 P14.3@7273,4539 7273,4573 7459,4759 U20.19@7459,4882
NetP14_4: P14.4 U11.6 U19.20 U20.20 | length 1003.6
  Top Layer w7: U20.20@7404,4787 7404,4991 7445,5032 U19.20@7445,5172
  Top Layer w10: U11.6@7326.58,4391.56 7326.58,4470.47 7299.57,4497.47 7255.8,4497.47 7236.27,4517 7195,4517 P14.4@7173,4539 7173,4546 U20.20@7409,4782
NetP14_5: P14.5 U11.8 U19.22 U20.22 | length 1052.9
  Top Layer w7: U20.22@7309,4782 7309,5136 U19.22@7345,5172
  Top Layer w10: U11.8@7287.21,4391.56 7288.98,4393.34 7288.98,4441.98 ; 7288.11,4441.11 7231.23,4498 7190.73,4498 7190.2,4497.47 7152.53,4497.47 7111,4539 P14.5@7073,4539 7073,4546 U20.22@7309,4782
NetP14_6: P14.6 U11.9 U19.23 U20.23 | length 1269.8
  Top Layer w7: P14.6@6973,4539 7075.5,4641.5 7119.3,4641.5 7223,4745.2 7223,4745.8 7259,4781.8 U20.23@7259,4882 7295,4918 U19.23@7295,5272
  Top Layer w10: P14.6@6973,4539 7031.53,4480.47 7197.24,4480.47 7197.77,4481 7215,4481 7258.5,4437.5 ; 7258.61,4437.61 7267.52,4428.69 U11.9@7267.52,4391.56
NetP14_7: P14.7 U11.11 U19.24 U20.24 | length 1346.8
  Top Layer w7: 7007,4615 7047.5,4655.5 7113.5,4655.5 7209,4751 U20.24@7209,4782 7209,5136 U19.24@7245,5172
  Top Layer w10: 7007,4615 6984,4615 6908,4539 P14.7@6873,4539 6873,4464.96 6874.49,4463.47 7203.16,4463.47 7226.37,4440.26 7226.37,4393.34 U11.11@7228.15,4391.56
NetP14_8: P14.8 U11.12 U19.25 U20.25 | length 1522.6
  Top Layer w7: P14.8@6773,4539 6808,4539 6912,4643 7015.2,4643 7041.7,4669.5 7046.7,4669.5 7144.5,4767.3 7144.5,4796.7 7130.5,4810.7 7130.5,4853.5 U20.25@7159,4882 7195,4918 U19.25@7195,5272
  Top Layer w10: P14.8@6773,4539 6865.53,4446.47 7190.69,4446.47 7206.69,4430.47 7206.69,4391.56 U11.12@7208.47,4391.56
NetP14_9: P14.9 U11.13 U19.26 U20.26 | length 2015.8
  Top Layer w7: U20.26@7109,4782 7109,5136 U19.26@7145,5172 v1@7145,4996 ; U11.13@7190,4391.56 7190,4366 7192.06,4366 7192.06,4353.27 7201.67,4343.66 7228.87,4343.66 7248,4324.53 7248,4319 7251,4316 v2(7259,4316)
  Top Layer w10: v1(6836,4671) 6838.18,4673.18 7000.18,4673.18 U20.26@7109,4782
  Bottom Layer w7: v1(7143,4981) 7123.5,4961.5 7123.5,4645.11 7217,4551.61 7217,4355.53 7256.53,4316 v2(7259,4316)
  Bottom Layer w10: P14.9@6673,4539 6673,4610 6734,4671 v1(6836,4671)
NetP15_1: P15.1 U3.3 U12.1 | length 2728
  Top Layer w10: U3.3@9659.78,4676.59 U3.3@9658,4678.37 9704.63,4678.37 9739,4644 9739,4545 P15.1@9819,4465 10374,3910 10374,3788.96 10225,3639.96 v1(10225,3544)
  Bottom Layer w10: v1(10225,3544) 10474,3295 10474,2791 10382.78,2699.78 10382.78,2524.5 10404.5,2524.5 U12.1@10421,2508
NetP15_2: P15.2 U3.5 U12.2 U13.11 | length 2698.3
  Top Layer w10: U3.5@9656.22,4715.96 9706.7,4715.96 9756,4666.66 9756,4628 P15.2@9819,4565 ; U12.2@10321,2608 10642,2929 U13.11@10642,3230 v1(10642,3502)
  Bottom Layer w10: P15.2@9819,4565 9852.25,4565 10642,3775.25 v1(10642,3502)
NetP15_3: P15.3 U3.6 U12.30 | length 2605.9
  Top Layer w10: U3.6@9659.78,4739.2 U3.6@9658,4737.43 9659.78,4735.65 9711.05,4735.65 9781.7,4665 P15.3@9819,4665 10410,4074 10410,3565 v1(10386,3541)
  Bottom Layer w10: v1(10386,3541) 10385,3540 10574,3351 10574,3214.75 10572,3212.75 10572,2659 U12.30@10521,2608
NetR5_2: R5.2 U1.4 | length 133.2
  Top Layer w10: v1(6446,1894) 6497,1945 U1.4@6500,1945
  Bottom Layer w10: R5.2@6393.53,1882 6435,1882 6446,1893 v1(6446,1894)
NetR7_1: R7.1 U3.41 | length 271
  Top Layer w10: v1(9279,4779) 9281.2,4776.8 U3.41@9366.66,4776.8
  Bottom Layer w10: v1(9279,4779) 9279,4770 9332,4717 R7.1@9430.47,4717
NetR8_2: R8.2 U8.25 | length 134.3
  Top Layer w7: v1(6725,2595) 6725,2597 6764.34,2636.34 U8.25@6764.34,2639.69
  Bottom Layer w7: R8.2@6702.53,2659 6702.53,2617.47 v1(6725,2595)
NetR10_2: R10.2 R65.1 U17.1 | length 214.1
  Top Layer w10: U17.1@6022.53,4563.53 U17.1@6035,4576 U17.1@6044.53,4585.53
  Top Layer w30: R65.1@6022.53,4464 U17.1@6022.53,4563.53 ; U17.1@6044.53,4585.53 R10.2@6128,4585.53
NetR13_2: R13.2 X1.1 | length 295.5
  Top Layer w8: R13.2@8919.53,1951 9109,1951 X1.1@9184,2026
NetR14_1: R14.1 U2.1 | length 146.3
  Top Layer w10: v1(7355,2056) 7356,2055 7363,2055 U2.1@7434,1984
  Bottom Layer w10: v1(7355,2056) R14.1@7355,2093.47
NetR15_1: R15.1 U3.1 | length 127.7
  Top Layer w10: v1(9611,4599) 9618,4599 U3.1@9658,4639
  Bottom Layer w10: R15.1@9603.53,4660 9611,4652.53 v1(9611,4599)
NetR16_2: R16.2 U4.48 | length 237.2
  Top Layer w10: U4.48@6761.34,3682.44 6861.44,3682.44 6875,3696 v1(6875,3706)
  Bottom Layer w10: R16.2@6774.53,3724 6857,3724 v1(6875,3706)
NetR17_2: R17.2 U2.48 | length 128.1
  Top Layer w10: v1(7395,2230) 7434,2269 U2.48@7434,2275.34
  Bottom Layer w10: v1(7395,2230) 7413.47,2211.53 R17.2@7454,2211.53
NetR18_2: R18.2 U3.48 | length 121.9
  Top Layer w10: U3.48@9366.66,4639 9377,4639 v1(9411,4605)
  Bottom Layer w10: v1(9411,4605) 9431.47,4625.47 R18.2@9431.47,4660
NetR19_2: R19.2 U4.25 | length 144.2
  Top Layer w7: v2(6700,3185) 6729,3185 6761.34,3217.34 U4.25@6761.34,3229.69
  Bottom Layer w7: v2(6700,3185) 6700,3238.53 6702,3240.53 R19.2@6702.53,3240
NetR20_2: R20.2 U3.25 | length 124.5
  Top Layer w10: U3.25@9366.66,5091.76 9366.66,5111.66 9380,5125 v1(9390,5125)
  Bottom Layer w10: v1(9390,5125) 9405,5125 9428.47,5101.53 R20.2@9428.47,5074
NetR21_2: R21.2 U2.25 | length 102.4
  Top Layer w10: U2.25@7886.76,2275.34 7903.66,2275.34 v1(7921,2258)
  Bottom Layer w10: R21.2@7886,2211.53 7921,2246.53 v1(7921,2258)
NetR22_1: R22.1 U5.159 | length 144.5
  Top Layer w7: U5.159@7553.39,3887.09 7550.11,3883.81 7550.11,3836.2 7570,3816.3 v2(7570,3805)
  Bottom Layer w7: v2(7570,3805) 7574.47,3809.47 R22.1@7574.47,3856
NetR23_1: R23.1 U5.25 | length 156
  Top Layer w10: U5.25@7612.44,2580 7612.44,2523.46 7607.98,2519 7607.98,2484.42 7618.4,2474 v2(7618,2474)
  Bottom Layer w10: v2(7618,2474) R23.1@7661.47,2474
NetR24_1: R24.1 U5.17 | length 284
  Top Layer w7: U5.17@7454.96,2580 7454.96,2500.04 v2(7460,2495)
  Bottom Layer w7: v2@7455,2500 7465,2500 7469.53,2504.53 R24.1@7469.53,2685
NetR25_2: R25.2 U5.30 | length 199.1
  Top Layer w10: U5.30@7710.87,2580 7710.87,2474.13 7730,2455 v2(7740,2455)
  Bottom Layer w10: R25.2@7726,2499 R25.2@7730,2499 ; R25.2@7730,2501 R25.2@7730,2499 ; R25.2@7732,2499 R25.2@7730,2499 ; v2(7740,2455) 7740,2489 R25.2@7730,2499
NetR26_1: R26.1 U5.153 | length 199.7
  Top Layer w7: U5.153@7671.5,3887.09 7671.5,3944.9 7677,3950.4 7677,4012 7680,4015 v1(7685,4015)
  Bottom Layer w7: v1(7685,4015) 7690,4020 7690,3964.53 R26.1@7689.47,3964
NetR27_2: R27.2 U5.164 | length 185.7
  Top Layer w7: U5.164@7454.96,3887.09 7454.96,3978.96 7490,4014 7490,4015 v1(7484,4021)
  Bottom Layer w7: R27.2@7452.53,4029 7476,4029 v1(7484,4021)
NetR28_1: R28.1 U6.24 | length 117.5
  Top Layer w7: v1(8866,2852) 8896.53,2821.47 U6.24@8896.53,2812.81
  Bottom Layer w7: R28.1@8835.53,2799 8835.53,2821.53 v1(8866,2852)
NetR29_1: R29.1 U8.24 | length 123
  Top Layer w10: v1(6431,2589) 6428,2592 6428,2594.69 U8.24@6473,2639.69
  Bottom Layer w10: v1(6431,2589) R29.1@6483.47,2589
NetR30_1: R30.1 U7.24 | length 168.3
  Top Layer w10: v6(7735.47,4355.53) 7723,4368 7771,4416 U7.24@7792.25,4416
  Bottom Layer w10: v6(7735.47,4355.53) R30.1@7797,4355.53
NetR31_2: R31.2 U15.19 | length 91.5
  Bottom Layer w10: U15.19@5638,1739 R31.2@5729.47,1739
NetR32_2: R32.2 U6.48 | length 155.6
  Top Layer w7: U6.48@8605.19,2360.06 8605.19,2340.81 v1(8629,2317)
  Bottom Layer w7: v1(8629,2317) 8632,2317 8667.47,2352.47 R32.2@8667.47,2402
NetR33_2: R33.2 U7.48 | length 132.1
  Top Layer w7: U7.48@8245,4124.66 8245,4129 v1(8296,4180)
  Bottom Layer w7: R33.2@8241,4178.47 8242.53,4180 v1(8296,4180)
NetR34_2: R34.2 U8.48 | length 103.4
  Top Layer w10: v2(6746,3123) 6764.34,3104.66 U8.48@6764.34,3092.44
  Bottom Layer w10: R34.2@6699.53,3094 6699.53,3105.53 6717,3123 v2(6746,3123)
NetR35_2: R35.2 U11.25 | length 178.6
  Top Layer w7: v1(6888,4111) 6888,4074 6946.02,4074 U11.25@6972.25,4100.22
  Bottom Layer w7: v1@6886.2,4111 v1(6888,4111) 6891,4114 R35.2@6891,4154.47
NetR36_2: R36.2 U7.25 | length 160.9
  Top Layer w10: v6(7741,4195) 7792.25,4143.75 U7.25@7792.25,4124.66
  Bottom Layer w10: v6(7741,4195) 7751.53,4184.47 R36.2@7806,4184.47
NetR37_2: R37.2 U6.25 | length 110.7
  Top Layer w7: U6.25@8605.19,2812.81 8605.19,2819.19 v1(8633,2847)
  Bottom Layer w7: v1(8633,2847) 8664.47,2815.53 R37.2@8664.47,2795
NetR38_2: R38.2 U9.2 | length 60.3
  Top Layer w10: U9.2@7254,2319 7311.47,2319 R38.2@7313.47,2321
NetR39_1: R39.1 U10.24 | length 110.7
  Top Layer w10: v1(8863,3410) 8887,3386 U10.24@8887,3370.76
  Bottom Layer w10: R39.1@8837.53,3359 8837.53,3384.53 v1(8863,3410)
NetR40_1: R40.1 U10.1 | length 126.5
  Top Layer w10: U10.1@8887,2918 8887,2894 8895,2886 8893,2886 v1(8889,2890)
  Bottom Layer w10: R40.1@8839.53,2945 8839.53,2931.47 8885,2886 v1(8889,2890)
NetR41_1: R41.1 U11.1 | length 181.4
  Top Layer w10: U11.1@7425,4391.56 v6@7498,4318.56
  Bottom Layer w10: R41.1@7415,4328.53 7414.53,4329 v6(7492,4329)
NetR42_2: R42.2 U11.48 | length 147.7
  Top Layer w10: U11.48@7425,4100.22 v6(7479.78,4155)
  Bottom Layer w10: R42.2@7422,4155.47 7422.47,4155 v6(7479.78,4155) v6@7492,4155
NetR43_2: R43.2 U10.48 | length 121.4
  Top Layer w10: U10.48@8595.66,2918 8606,2918 v1(8633,2891)
  Bottom Layer w10: v1(8633,2891) 8666.47,2924.47 R43.2@8666.47,2950
NetR44_2: R44.2 U11.29 | length 225.8
  Top Layer w7: v1(7029,4033) 7041,4033 7050.99,4042.99 U11.29@7050.99,4100.22
  Bottom Layer w7: v1(7029,4033) 7029,4028 7053,4052 R44.2@7053,4155.47
NetR45_2: R45.2 U11.24 | length 196.4
  Top Layer w10: v6(6920,4355) 6920,4366 6912,4374 6929.56,4391.56 U11.24@6972.25,4391.56
  Bottom Layer w10: v6(6920,4355) 6920,4331.47 6924.94,4326.53 R45.2@7001,4326.53
NetR46_1: R46.1 U13.30 | length 127.7
  Bottom Layer w10: R46.1@9789.53,3936 9842,3883.53 U13.30@9842,3830
NetR47_1: 
NetR47_2: 
NetR49_1: 
NetR51_1: 
NetR53_2: R53.2 S1.2 U1.1 | length 1218.5
  Top Layer w10: S1.2@5925,1335 5945,1355 5945,1579.03 5975,1609.03 5975,1668.97 5967.97,1676 5967.97,1682.97 6309.5,2024.5 6403.5,2024.5 6448,2069 6474,2069 U1.1@6500,2095 6424,2095 6419,2090 v1(6417,2092)
  Bottom Layer w10: R53.2@6394.53,2043 6394.53,2069.53 v1(6417,2092)
NetR54_2: R54.2 SW1.1 U2.3 | length 1498
  Top Layer w10: v1(6280,1594) 6280,1696 SW1.1@6321,1737 6321,1746 6382,1807 6882.92,1807 6914.42,1838.5 6916.42,1838.5 6995.52,1917.6 7458.1,1917.6 7471.59,1931.09 7471.59,1984 U2.3@7473.37,1984
  Bottom Layer w10: v1(6280,1594) 6282.47,1591.53 R54.2@6326,1591.53
NetR55_2: R55.2 SW2.1 U2.8 | length 947.1
  Top Layer w10: v1(7047,1653) 6976,1724 SW2.1@6976,1773 7069,1866 7244.96,1866 7245.56,1866.6 7496.18,1866.6 7571.8,1942.21 U2.8@7571.8,1984
  Bottom Layer w10: R55.2@6971.31,1634.93 6968.9,1632.53 R55.2@6981,1632.53 7026.53,1632.53 v1(7047,1653)
NetR56_2: R56.2 U15.11 | length 82.5
  Bottom Layer w10: U15.11@5638,2539 R56.2@5720.47,2539
NetR57_2: R57.2 SW1.3 U2.5 | length 1282.9
  Top Layer w10: SW1.3@6521,1737 6836.96,1737 6921.46,1821.5 6923.46,1821.5 7002.56,1900.6 7480.35,1900.6 ; 7480.5,1901.5 7510.96,1931.96 7510.96,1982.22 U2.5@7512.74,1984
  Bottom Layer w10: R57.2@6486,1591.53 6486,1702 SW1.3@6521,1737
NetR58_2: R58.2 SW2.3 U2.9 | length 685.9
  Top Layer w10: SW2.3@7176,1773 7252.6,1849.6 7503.22,1849.6 7589.7,1936.08 7589.7,1984 U2.9@7591.48,1984
  Bottom Layer w10: R58.2@7141,1632.53 7141,1738 SW2.3@7176,1773
NetR59_2: R59.2 SW1.4 U2.6 | length 1726.7
  Top Layer w10: SW1.4@6521,1147 6672,1147 6733,1208 6733,1609 6928.5,1804.5 ; 6929.5,1803.5 7009.6,1883.6 7489.14,1883.6 7534.5,1928.96 7534.5,1944.79 7534.2,1945.09 7534.2,1958.96 7530.65,1962.52 7530.65,1982.22 U2.6@7532.43,1984
  Bottom Layer w10: SW1.4@6521,1151.47 R59.2@6590,1220.47
NetR60_2: R60.2 SW2.4 U2.11 | length 1149
  Top Layer w10: SW2.4@7176,1183 7184,1175 7255.92,1175 7388,1307.08 7388,1704.02 7546.96,1862.97 7549.56,1862.97 7629.07,1942.49 7629.07,1949.31 7629.94,1950.18 7629.94,1983.09 U2.11@7630.85,1984
  Bottom Layer w10: R60.2@7141,1268.47 7176,1233.47 SW2.4@7176,1183
NetR61_2: R61.2 U16.3@5845,4845 | length 108.2
  Top Layer w10: R61.2@5738,4842 R61.2@5741,4845
  Top Layer w30: R61.2@5741,4845 U16.3@5845,4845
NetR62_1: R62.1 R67.2 U16.1@6045,4845 | length 229.6
  Top Layer w10: U16.1@6029.53,4829.53 U16.1@6045,4845 ; R67.2@6150.53,4845 R67.2@6151,4845.47
  Top Layer w30: R62.1@6029.53,4728 U16.1@6029.53,4829.53 ; U16.1@6045,4845 R67.2@6150.53,4845
NetR63_2: R63.2 U17.3 | length 106
  Top Layer w10: R63.2@5734,4588 R63.2@5746,4576
  Top Layer w30: R63.2@5746,4576 U17.3@5835,4576
NetR64_2: R64.2 U15.13 | length 84.5
  Bottom Layer w10: U15.13@5638,2339 R64.2@5722.47,2339
NetR66_1: R66.1 R68.2 U18.1 | length 230.8
  Top Layer w10: R66.1@5997.53,4072 R66.1@5999.53,4070 ; U18.1@5997.53,4286.53 U18.1@6007,4296
  Top Layer w30: R66.1@5997.53,4072 R68.2@5997.53,4177 U18.1@5997.53,4286.53
NetR94_3: 
NetR95_1: R95.1 U19.28 U20.28 | length 1165
  Top Layer w7: U20.28@7009,4782 6962,4829 6962,4920 7045,5003 U19.28@7045,5172
  Bottom Layer w7: U19.28@7045,5172 7322.03,4894.97 7322.03,4857.97 7340,4840 7468,4840 7529,4901 7529,4903.53 R95.1@7564.47,4939
NetR95_2: R95.2 U7.19 | length 685.2
  Top Layer w10: v1(7718.9,4911.9) 7720,4910.8 7720,4893.62 7720.5,4893.12 7720.5,4862.5 7748,4835 7748,4736 7890.67,4593.33 U7.19@7890.67,4416
  Bottom Layer w10: R95.2@7623.53,4939 7691.8,4939 v1(7718.9,4911.9) 7719,4911.8 7719,4906 v1@7715,4910
NetR99_1: R99.1 U19.16 U20.16 | length 782.6
  Bottom Layer w7: U19.16@7645.22,5171.78 U19.16@7645,5172 7645,5104 7798,4951 7798,4821.2 7773.5,4796.7 7773.5,4746.5 7790.75,4729.25 7790.75,4700.28 R99.1@7773.47,4683
  Bottom Layer w10: U20.16@7609,4782 7708,4683 R99.1@7773.47,4683
NetR99_2: R99.2 U7.17 | length 438.2
  Top Layer w10: U7.17@7931.82,4414.22 7931.82,4377.09 7932.05,4376.86 v2(7932.05,4352.3) v2@7932.05,4348.05
  Bottom Layer w10: R99.2@7832.53,4683 7932.05,4583.48 v2(7932.05,4352.3)
NetR101_1: R101.1 R115.2 U25.1 | length 266.8
  Top Layer w30: R101.1@5699.53,3613 5699.53,3715.53 U25.1@5728,3744 5728,3806.53 R115.2@5771.47,3850
NetR102_2: R102.2 U15.15 | length 80.5
  Bottom Layer w10: U15.15@5638,2139 R102.2@5718.47,2139
NetR103_1: R103.1 R104.2 U21.1 | length 252.4
  Top Layer w10: R104.2@5037,3823.53 R104.2@5042.47,3829
  Top Layer w30: R103.1@5027,3583 5027,3696 U21.1@5037,3706 R104.2@5037,3823.53
NetR107_2: 
NetR109_2: R109.2 U15.17 | length 90.7
  Bottom Layer w10: U15.17@5638,1939 R109.2@5724.47,1939
  Bottom Layer w30: R109.2@5724.47,1939 R109.2@5727.47,1936
NetR110_2: R110.2 U15.1 | length 101.3
  Bottom Layer w10: R110.2@5851,1673.47 5903.53,1673.47 U15.1@5938,1639
NetR111_1: R111.1 U19.1 | length 386.7
  Top Layer w10: R111.1@8132.53,5081 8262,5081 v1(8263,5082)
  Bottom Layer w10: v1(8263,5082) 8282,5101 8282,5178 8376,5272 U19.1@8395,5272
NetR112_1: R112.1 U20.1 | length 266.1
  Top Layer w10: R112.1@8133.53,4980 8134.53,4979 v1(8262,4979)
  Bottom Layer w10: v1(8262,4979) U20.1@8359,4882
NetR114_1: R114.1 | length 78.2
  Bottom Layer w10: v1(5904,2682) 5905,2681 5965.53,2681 R114.1@5977,2692.47
NetR117_1: R117.1 U3.40 | length 127.7
  Top Layer w10: U3.40@9366.66,4796.48 9412.52,4796.48 9438,4771 v2(9440,4771)
  Bottom Layer w10: R117.1@9432,4811.47 9432,4779 v2(9440,4771)
NetR119_1: R119.1 U8.44 | length 170.4
  Top Layer w7: U8.44@6764.34,3013.7 6803.7,3013.7 v2@6820,3030 ; v2@6830,3027.52 v2(6830,3035)
  Bottom Layer w7: v2@6830,3032.48 v2@6828.52,3031 ; v2(6830,3035) 6821.99,3035 v2@6826.5,3030.5 ; R119.1@6889.47,3070 6850.47,3031 v2@6828.52,3031 ; v2@6826.5,3030.5 v2@6827.26,3029.73 ; v2@6826.5,3030.5 6827,3031 v2@6828.52,3031 ; v2@6826.5,3030.5 6826.24,3030.24 6827,3029.48 v2@6827.26,3029.73 ; v2@6827.26,3029.73 v2@6828.52,3031
NetR120_2: R120.2 U8.5 | length 200.1
  Top Layer w7: R120.2@6299.53,3078 6314,3078 6378,3014 6472.7,3014 U8.5@6473,3013.7
NetR121_1: R121.1 U8.43 | length 98.9
  Top Layer w7: U8.43@6764.34,2994.02 U8.43@6767.62,2990.74 ; U8.43@6800.36,2993 6802.36,2995 v2(6830,2995)
  Bottom Layer w7: v2(6830,2995) v2@6837.65,2995 ; v2@6837.33,3002.33 6847,3012 R121.1@6889.47,3012
NetR122_2: R122.2 U8.6 | length 182.2
  Top Layer w7: R122.2@6301.53,3020 6348,3020 6374,2994 U8.6@6473,2994.02
NetR123_1: R123.1 U8.41 | length 134.3
  Top Layer w7: U8.41@6764.34,2954.65 6824.35,2954.65 v2(6837,2942)
  Bottom Layer w7: v2(6837,2942) 6876.47,2942 R123.1@6888.47,2954
NetR124_2: R124.2 U8.8 | length 218.2
  Top Layer w7: R124.2@6300.53,2947 6300.53,2952.24 6470.59,2952.24 U8.8@6473,2954.65 6438.1,2954.65 6434.82,2957.92
NetR125_1: R125.1 U8.40 | length 106.1
  Top Layer w7: 6804.44,2934.96 6839.4,2900 6840,2900.6 v2(6840,2905)
  Bottom Layer w7: v2(6840,2905) 6847,2898 R125.1@6888.47,2898
NetR126_2: R126.2 U8.9 | length 227.7
  Top Layer w7: R126.2@6298.53,2891.42 R126.2@6298.53,2895 6388.24,2895 6424.92,2931.68 6463.16,2931.68 6469.72,2938.24 6434.71,2938.24
NetR127_1: R127.1 U8.38 | length 152.2
  Top Layer w7: U8.38@6764.34,2895.59 6805.41,2895.59 6840,2861 v2(6840,2865)
  Bottom Layer w7: v2(6840,2865) 6861,2844 R127.1@6889.47,2844
NetR128_2: R128.2 U8.11 | length 198.5
  Top Layer w7: R128.2@6297.53,2840 6363,2840 6418.59,2895.59 U8.11@6473,2895.59
NetR129_1: R129.1 U8.37 | length 161.9
  Top Layer w7: v1(6685,2925) 6686,2925 6716.44,2894.56 6716.44,2879.18 6761.06,2879.18 U8.37@6764.34,2875.91
  Bottom Layer w7: v1(6685,2925) 6694,2925 6694.53,2924.47 R129.1@6694.53,2881
NetR130_2: R130.2 U8.12 | length 212.3
  Top Layer w7: R130.2@6297.53,2787 6330,2787 6418.91,2875.91 U8.12@6473,2875.91
NetR131_2: R131.2 U11.27 | length 267.5
  Top Layer w7: v1(6971.5,4009.5) 6971.5,4015.1 7013,4056.6 7013,4098.84 U11.27@7011.62,4100.22
  Bottom Layer w7: v1(6971.5,4009.5) 6971.5,4015.1 7003,4046.6 R131.2@7003,4155.47
NetR132_2: R132.2 U11.26 | length 215.2
  Top Layer w7: v1(6939,4046) 6940,4045 6964.4,4045 6971.4,4052 6980,4052 6988.65,4060.65 6988.65,4096.94 U11.26@6991.93,4100.22
  Bottom Layer w7: v1@6947,4042 v1(6939,4046) R132.2@6947,4154.47
NetR133_2: R133.2 U10.25 | length 109.3
  Top Layer w10: U10.25@8595.66,3370.76 8595.66,3402.66 v1(8596,3403)
  Bottom Layer w10: v1(8596,3403) 8638,3403 8656,3385 R133.2@8665.47,3385
NetU3_2: U3.2 U13.29 | length 968.1
  Top Layer w10: U3.2@9658,4658.69 9659.78,4656.91 9696.91,4656.91 9722,4631.82 9722,4485.97 9942,4265.97 U13.29@9942,3830